# EAGLE board IDHolder_Cover (EAGLE 9.5.1)
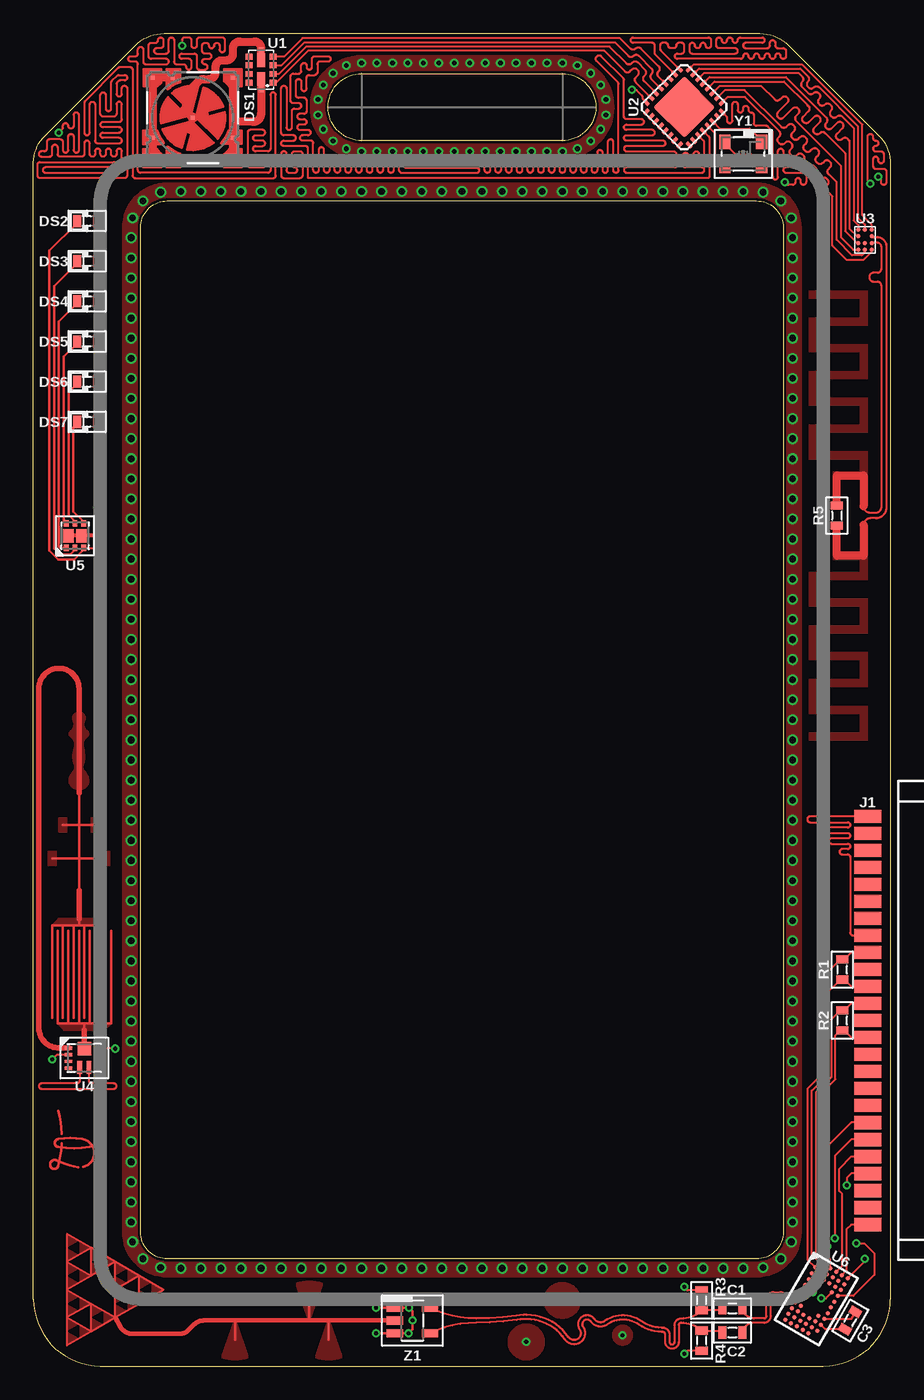
[diagram p0: board, top side]
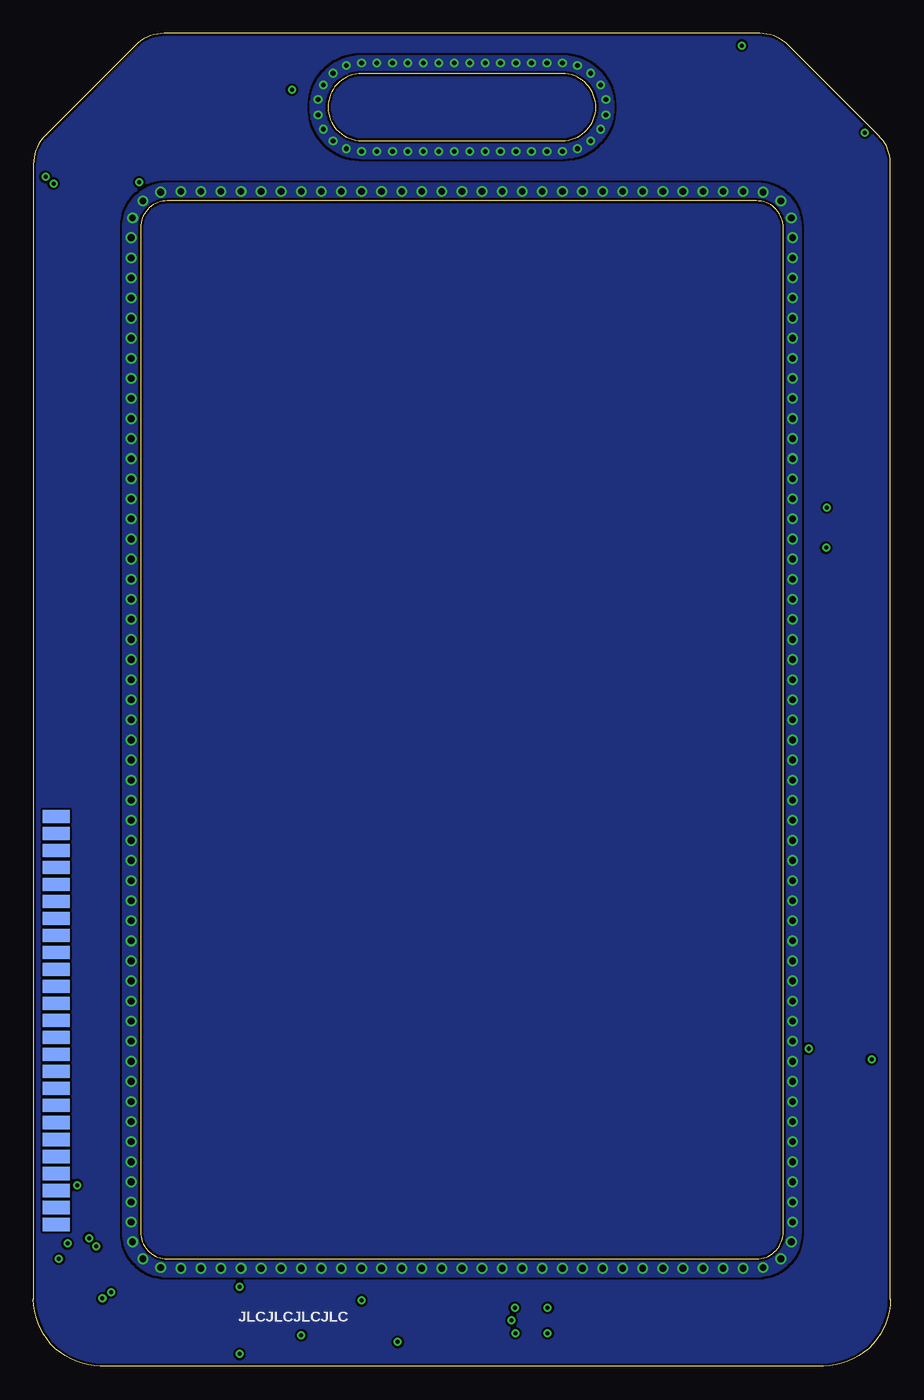
[diagram p1: board, bottom side, seen from below]

Size 64 x 99.5 mm. Coordinates in mm from the lower left corner, seen from the top.
Outline: 8,85 arc-90 10,87 54,87 arc-90 56,85 56,10 arc-90 54,8 10,8 arc-90 8,10 8,85
Outline: 0,5 0,89.86 arc-45 0.88,91.88 7.62,98.62 arc-45 9.74,99.5 54.26,99.5 arc-45 56.38,98.62 63.12,91.88 arc-45 64,89.76 64,5 arc-90 59,0 5,0 arc-90 0,5
Outline: 24.5,96.5 39.5,96.5 arc-90 42,94 arc-90 39.5,91.5 24.5,91.5 arc-90 22,94 arc-90 24.5,96.5
Copper layers (1*16): Top 0.035mm / dielectric 0.93mm / Bottom 0.035mm
Design rules "2 layer *": minimum track width 0.16mm, minimum drill 0.3mm, track to track 0.16mm, track to pad 0.16mm, pad to pad 0.16mm, via to via 0.16mm, smd to smd 0mil, copper to edge 0.2mm, drill to drill 0.3mm, minimum pad ring 0.15mm, minimum via ring 0.15mm, stop-mask expansion 0mil, vias tented up to drill 1mm, thermal gap 0.25mm

## Footprints (pad centres in the part's own frame; a part is rotated, then mirrored left to right if it is on the bottom)
1608 = smd 0.6 x 0.9: 1 -0.75,0; 2 0.75,0
LZ4-40U600 = smd 0.3 x 0.3: 1 -3,3; 2 -1.5,3; 3 3,3; 4 3,-1.5; 5 3,-3; 6 -1.5,-3; 7 -3,-3; 8 -3,-1.5; TH 0,0
1608-POL = smd 0.6 x 0.9: A 0.75,0; C -0.75,0
9M501X91 = smd 0.98 x 2.03: 1 -15.24,-3.29; 2 -13.97,-3.29; 3 -12.7,-3.29; 4 -11.43,-3.29; 5 -10.16,-3.29; 6 -8.89,-3.29; 7 -7.62,-3.29; 8 -6.35,-3.29; 9 -5.08,-3.29; 10 -3.81,-3.29; 11 -2.54,-3.29; 12 -1.27,-3.29; 13 0,-3.29; 14 1.27,-3.29; 15 2.54,-3.29; 16 3.81,-3.29; 17 5.08,-3.29; 18 6.35,-3.29; 19 7.62,-3.29; 20 8.89,-3.29; 21 10.16,-3.29; 22 11.43,-3.29; 23 12.7,-3.29; 24 13.97,-3.29; 25 15.24,-3.29 | smd 0.98 x 2.03 bottom: 26 -15.24,-3.29; 27 -13.97,-3.29; 28 -12.7,-3.29; 29 -11.43,-3.29; 30 -10.16,-3.29; 31 -8.89,-3.29; 32 -7.62,-3.29; 33 -6.35,-3.29; 34 -5.08,-3.29; 35 -3.81,-3.29; 36 -2.54,-3.29; 37 -1.27,-3.29; 38 0,-3.29; 39 1.27,-3.29; 40 2.54,-3.29; 41 3.81,-3.29; 42 5.08,-3.29; 43 6.35,-3.29; 44 7.62,-3.29; 45 8.89,-3.29; 46 10.16,-3.29; 47 11.43,-3.29; 48 12.7,-3.29; 49 13.97,-3.29; 50 15.24,-3.29
MLP832 = smd 0.44 x 0.55: 1 -0.975,-0.9; 2 -0.325,-0.9; 3 0.325,-0.9; 4 0.975,-0.9; 5 0.975,0.9; 6 0.325,0.9; 7 -0.325,0.9; 8 -0.975,0.9 | smd 1.02 x 0.63: F1 -0.7,0; F2 0.7,0 | smd 0.61 x 0.4: F1@1 -1.375,0; F2@2 1.375,0
LFCSP32 = smd 0.55 x 0.3: 1 -2.25,1.75; 2 -2.25,1.25; 3 -2.25,0.75; 4 -2.25,0.25; 5 -2.25,-0.25; 6 -2.25,-0.75; 7 -2.25,-1.25; 8 -2.25,-1.75; 17 2.25,-1.75; 18 2.25,-1.25; 19 2.25,-0.75; 20 2.25,-0.25; 21 2.25,0.25; 22 2.25,0.75; 23 2.25,1.25; 24 2.25,1.75 | smd 0.3 x 0.55: 9 -1.75,-2.25; 10 -1.25,-2.25; 11 -0.75,-2.25; 12 -0.25,-2.25; 13 0.25,-2.25; 14 0.75,-2.25; 15 1.25,-2.25; 16 1.75,-2.25; 25 1.75,2.25; 26 1.25,2.25; 27 0.75,2.25; 28 0.25,2.25; 29 -0.25,2.25; 30 -0.75,2.25; 31 -1.25,2.25; 32 -1.75,2.25 | smd 3.25 x 3.25: EXP 0,0
BGA_CB11 = smd 0.33 x 0.33: A1 -0.5,0.75; A2 0,0.75; A3 0.5,0.75; B1 -0.5,0.25; B2 0,0.25; B3 0.5,0.25; C1 -0.5,-0.25; C3 0.5,-0.25; D1 -0.5,-0.75; D2 0,-0.75; D3 0.5,-0.75
QFN-TPS61089 = smd 0.55 x 0.25: 1 -1.175,0.75; 2 -1.175,0.25; 3 -1.175,-0.25; 4 -1.175,-0.75; 7 1.175,-0.75; 8 1.175,-0.25; 9 1.175,0.25; 10 1.175,0.75 | smd 0.35 x 1: 5 -0.35,-0.7; 6 0.35,-0.7 | smd 1 x 1: 11 0,0.7
UDFN-6 = smd 0.47 x 0.35: 1 -0.915,0.65; 2 -0.915,0; 3 -0.915,-0.65; 4 0.915,-0.65; 5 0.915,0; 6 0.915,0.65 | smd 1 x 0.77: PAD-BTM 0,-0.485; PAD-TOP 0,0.485
WFBGA48 = smd 0.32 x 0.32: A1 -1.25,2.5; A2 -0.75,2.5; A3 -0.25,2.5; A4 0.25,2.5; A5 0.75,2.5; A6 1.25,2.5; B1 -1.25,2; B2 -0.75,2; B3 -0.25,2; B4 0.25,2; B5 0.75,2; B6 1.25,2; C1 -1.25,1.5; C2 -0.75,1.5; C3 -0.25,1.5; C4 0.25,1.5; C5 0.75,1.5; C6 1.25,1.5; D1 -1.25,1; D2 -0.75,1; D5 0.75,1; D6 1.25,1; E1 -1.25,0.5; E6 1.25,0.5; F1 -1.25,0; F6 1.25,0; G1 -1.25,-0.5; G6 1.25,-0.5; H1 -1.25,-1; H2 -0.75,-1; H5 0.75,-1; H6 1.25,-1; J1 -1.25,-1.5; J2 -0.75,-1.5; J3 -0.25,-1.5; J4 0.25,-1.5; J5 0.75,-1.5; J6 1.25,-1.5; K1 -1.25,-2; K2 -0.75,-2; K3 -0.25,-2; K4 0.25,-2; K5 0.75,-2; K6 1.25,-2; L1 -1.25,-2.5; L2 -0.75,-2.5; L3 -0.25,-2.5; L4 0.25,-2.5; L5 0.75,-2.5
SMD-3225 = smd 0.85 x 1.1: 1 -1.365,-0.9; 2 1.365,-0.9; 3 1.365,0.9; 4 -1.365,0.9
SOT23-5 = smd 1.22 x 0.62: 1 -1.31,0.95; 2 -1.31,0; 3 -1.31,-0.95; 4 1.31,-0.95; 5 1.31,0.95

## Placement (x,y rotation side)
C1  [1608]  52.2,4.3 0 top
C2  [1608]  52.2,2.5 180 top
C3  [1608]  61,3.4 240 top
DS1  [LZ4-40U600]  11.9,93.2 0 top
DS2  [1608-POL]  4,85.5 0 top
DS3  [1608-POL]  4,82.5 0 top
DS4  [1608-POL]  4,79.5 0 top
DS5  [1608-POL]  4,76.5 0 top
DS6  [1608-POL]  4,73.5 0 top
DS7  [1608-POL]  4,70.5 0 top
E$1  [SIGN-BRADLEY]  3.35,16.85 0 top
J1  [9M501X91]  65.6,25.8 270 top
R1  [1608]  60.4,29.6 270 top
R2  [1608]  60.4,25.8 270 top
R3  [1608]  49.9,4.9 90 top
R4  [1608]  49.9,1.9 90 top
R5  [1608]  60,63.5 90 top
U1  [MLP832]  17,96.8 90 top
U2  [LFCSP32]  48.6,94 45 top
U3  [BGA_CB11]  62.1,84.1 180 top
U4  [QFN-TPS61089]  3.8,23 0 top
U5  [UDFN-6]  3.1,62 90 top
U6  [WFBGA48]  58.47,5 330 top
Y1  [SMD-3225]  53,90.5 180 top
Z1  [SOT23-5]  28.3,3.4 0 top

## Library data of the parts
C1-C3 R1-R5 = CougsInSpace-Capacitors
DS1 = led
DS2-DS7 = CougsInSpace-LEDs
E$1 = CougsInSpace-Aesthetics
J1 = con-3m
U1 = zetex
U2 U3 = analog-devices
U4 = CougsInSpace-IC-Power
U5 Z1 = CougsInSpace-DiscreteSemi
U6 = memory
Y1 = CougsInSpace-Clocks

## Nets
A_N: C2.2 R4.2 Z1.4
A_P: C1.1 R3.1 Z1.5
ANT_N: R5.1 U3.C1
ANT_P: R5.2 U3.B1
B_N: C2.1 U6.H1
B_P: C1.2 U6.G1
C_0: U1.1 U2.31
C_1: U1.2 U2.30
C_2: U1.3 U2.29
C_3: U1.4 U2.28
D_0: U2.24 U3.D1
D_1: U2.23 U3.D2
D_2: U2.22 U3.D3
D_3: U2.21 U3.C3
D_4: U2.20 U3.B3
D_5: U2.19 U3.A3
D_6: U2.18 U3.A2
D_7: U2.17 U3.A1
OUT: Z1.2
OUT_NEG: Z1.1 Z1.3
S$1: J1.14 R2.2 U6.A3
S$2: R4.1
S$3: U2.25 U2.26
S$4: DS1.1 DS1.2 DS1.3 DS1.4 DS1.5 DS1.6 DS1.7 DS1.8 U1.F1 U1.F1@1
S$5: U2.16
S$6: U2.32
S$7: J1.24
S$8: J1.23
S$9: U6.D6
S$11: J1.9 R1.1 U6.B1
S$12: U6.C1
S$13: J1.25 U6.A5
S$14: J1.21 U6.A4
S$15: J1.20
S$16: J1.19
S$17: J1.12 R2.1 U6.A2
S$18: J1.11 R1.2 U6.A1
S$19: U6.D1
S$20: DS2.A DS3.A DS4.A DS5.A DS6.A DS7.A U5.PAD-BTM U5.PAD-TOP
S$21: DS7.C U5.4
S$22: DS6.C U5.5
S$23: DS5.C U5.6
S$24: DS4.C U5.1
S$25: DS3.C U5.2
S$26: DS2.C U5.3
S$28: U2.1
S$29: U2.8
S$30: U2.9
S$31: U2.14 Y1.1
S$32: U2.13 Y1.3
S$33: J1.22
S$34: Y1.2 Y1.4
S$35: U6.A6
S$36: U6.D2
S$37: U6.D5
S$38: R3.2
S$39: U4.5 U4.6
S$40: J1.1 J1.8
S$41: C3.2 U6.J6
S$42: C3.1 U6.H6
S$44: DS1.TH U1.F2 U1.F2@2
S$47: U4.11
S$51: U4.10
S$52: U4.2
S$53: U4.1
S$61: U2.11 U2.12

## Tracks (layer width: path | path; a pad name or v marks a point on that pad's centre or on a via)
1  (via drill 0.3)
  other vias: 36.8,1.8
  pour Top: 38.1,1.8 arc90 36.8,3.1 arc90 35.5,1.8 arc90 36.8,0.5 arc90
2  (via drill 0.3)
  other vias: 44,2.3
  pour Top: 44,3 arc-90 44.7,2.3 arc-90 44,1.6 arc-90 43.3,2.3 arc-90
3  (via drill 0.3)
  other vias: 39.5,4.9
  pour Top: 40.8,4.9 arc90 39.5,6.2 arc90 38.2,4.9 arc90 39.5,3.6 arc90
A_N
  Top 0.16: Z1.4 arc-26 33.05,3.23 arc9 36.1,3.45 arc-9 36.85,3.5 arc-55 39.7,1.98 arc180 41.05,2.91 arc-180 41.64,3.32 arc90 42.85,3.1 arc-70 45.21,3.09 arc35 46.9,2.55 46.99,2.55 arc-90 47.18,2.36 47.18,1.8 arc180 48.2,1.8 48.2,3.05 arc-90 48.39,3.24 arc-43 R4.2 51.3,2.65 C2.2
A_P
  Top 0.16: Z1.5 arc26 33.05,3.55 arc9 36.05,3.77 arc-9 36.86,3.82 arc-55 39.96,2.16 arc180 40.79,2.73 arc-180 41.9,3.5 arc90 42.67,3.36 arc-70 45.4,3.35 arc35 46.9,2.87 46.99,2.87 arc-90 47.5,2.36 47.5,1.8 arc180 47.88,1.8 47.88,3.05 arc-90 48.39,3.56 arc43 R3.1 51.3,4.15 C1.1
ANT_N
  Top 0.16: U3.C1 62.65,84.3 63,84.3 arc-90 63.7,83.6 63.7,64.1 arc-90 62.9,63.3 62.5,63.3 arc90 62,62.8
  Top 0.6: 62,62.8 62,60.5 60,60.5 R5.1
  pour Top: 57.9,47.3 57.9,46.7 62.3,46.7 62.3,49.3 58.5,49.3 58.5,50.7 62.3,50.7 62.3,53.3 58.5,53.3 58.5,54.7 62.3,54.7 62.3,57.3 58.5,57.3 58.5,58.7 62.3,58.7 62.3,62.8 61.7,62.8 61.7,60.8 60.3,60.8 59.7,60.8 59.7,60.2 61.7,60.2 61.7,59.3 57.9,59.3 57.9,56.7 61.7,56.7 61.7,55.3 57.9,55.3 57.9,52.7 61.7,52.7 61.7,51.3 57.9,51.3 57.9,48.7 61.7,48.7 61.7,47.3
ANT_P
  Top 0.16: U3.B1 62.65,83.9 63,83.9 arc-90 63.3,83.6 63.3,81.91 arc-90 63.02,81.63 62.71,81.63 arc90 62.43,81.35 62.43,81.26 arc90 62.71,80.98 63.02,80.98 arc-90 63.3,80.7 63.3,64.1 arc-90 62.9,63.7 62.5,63.7 arc-90 62,64.2
  Top 0.6: 62,64.2 62,66.5 60,66.5 R5.2
  pour Top: 57.9,79.7 57.9,80.3 62.3,80.3 62.3,77.7 58.5,77.7 58.5,76.3 62.3,76.3 62.3,73.7 58.5,73.7 58.5,72.3 62.3,72.3 62.3,69.7 58.5,69.7 58.5,68.3 62.3,68.3 62.3,64.2 61.7,64.2 61.7,66.2 60.3,66.2 59.7,66.2 59.7,66.8 61.7,66.8 61.7,67.7 57.9,67.7 57.9,70.3 61.7,70.3 61.7,71.7 57.9,71.7 57.9,74.3 61.7,74.3 61.7,75.7 57.9,75.7 57.9,78.3 61.7,78.3 61.7,79.7
B_N
  Top 0.16: U6.H1 56.77,4.87 arc45 56.64,4.93 56.33,4.93 arc-45 55.97,5.08 55.91,5.14 arc45 55.77,5.2 55.26,5.2 arc90 55.07,5.01 55.07,3.75 arc-90 54.56,3.24 53.82,3.24 arc81 C2.1 | U6.H1
B_P
  Top 0.16: U6.G1 57.08,5.25 56.33,5.25 arc-45 56.2,5.31 56.13,5.37 arc45 55.77,5.52 55.26,5.52 arc90 54.75,5.01 54.75,3.75 arc-90 54.56,3.56 53.82,3.56 arc-81 C1.2 | U6.G1
BOTTOM
  pour Bottom (rank 2): 63.12,91.88 56.38,98.62 arc45 54.26,99.5 9.74,99.5 arc45 7.62,98.62 0.88,91.88 arc45 0,89.76 0,5 arc90 5,0 59,0 arc90 64,5 64,89.76 arc45
C_0
  Top 0.16: U2.31 44.99,95.84 arc-90 44.99,96.24 45.13,96.37 arc90 45.13,96.77 45.09,96.8 arc90 44.7,96.8 44.56,96.67 arc-90 44.17,96.67 42.63,98.2 20.5,98.2 18.12,95.83 U1.1
C_1
  Top 0.16: U2.30 45.61,95.92 arc-90 45.61,96.32 45.68,96.39 arc90 45.68,96.78 45.13,97.34 arc90 44.73,97.34 44.67,97.27 arc-90 44.27,97.27 43.02,98.52 20.37,98.52 18.32,96.47 U1.2
C_2
  Top 0.16: U2.29 46.16,96.08 arc-90 46.16,96.48 arc90 46.16,96.87 45.22,97.82 arc90 44.82,97.82 arc-90 44.42,97.82 43.41,98.84 20.23,98.84 18.52,97.12 U1.3
C_3
  Top 0.16: U2.28 46.68,96.27 arc-90 46.68,96.67 arc90 46.68,97.06 45.37,98.38 arc90 44.97,98.38 arc-90 44.58,98.38 43.79,99.16 20.09,99.16 18.71,97.78 U1.4
D_0
  Top 0.16: U2.24 49.33,97.2 57.4,97.2 61.9,92.7 61.9,85.92 62.6,85.22 U3.D1
D_1
  Top 0.16: U2.23 49.71,96.88 57.27,96.88 57.84,96.3 arc-90 57.84,95.91 arc90 57.84,95.51 57.88,95.47 arc90 58.28,95.47 arc-90 58.67,95.47 61.58,92.56 61.58,85.75 62.1,85.22 U3.D2
D_2
  Top 0.16: U2.22 50.09,96.56 57.14,96.56 57.41,96.28 arc-90 57.41,95.89 arc90 57.41,95.49 57.85,95.05 arc90 58.25,95.05 arc-90 58.64,95.05 58.67,95.02 arc-90 58.67,94.62 arc90 58.67,94.23 58.7,94.19 arc90 59.1,94.19 arc-90 59.5,94.19 59.56,94.13 arc-90 59.56,93.74 arc90 59.56,93.34 59.6,93.3 arc90 60,93.3 arc-90 60.39,93.3 61.26,92.43 61.26,85.54 61.6,85.2 U3.D3
D_3
  Top 0.16: U2.21 50.48,96.23 56.2,96.23 59.22,93.22 arc-90 59.22,92.82 arc90 59.22,92.43 59.22,92.42 arc90 59.62,92.42 60.01,92.82 arc-90 60.41,92.82 60.41,92.82 arc-90 60.41,92.42 60.02,92.02 arc90 60.02,91.63 60.02,91.63 arc90 60.41,91.63 arc-90 60.81,91.63 60.94,91.5 60.94,84.94 61.52,84.35 U3.C3
D_4
  Top 0.16: U2.20 50.87,95.91 56.06,95.91 57.8,94.18 | U3.B3 61.52,83.85 60.62,84.75 60.62,90.56 59.13,92.05 arc90 58.73,92.05 arc-90 58.34,92.05 58.32,92.07 arc-90 58.32,92.47 58.71,92.86 arc90 58.71,93.26 58.7,93.28 arc90 58.3,93.28 57.9,92.88 arc-90 57.51,92.88 57.49,92.9 arc-90 57.49,93.29 57.89,93.69 arc90 57.89,94.09 57.8,94.18 | 57.8,94.18
D_5
  Top 0.16: U2.19 51.26,95.59 54.33,95.59 55.35,94.58 arc90 55.74,94.58 55.89,94.72 arc-90 56.28,94.72 56.3,94.71 arc-90 56.3,94.31 55.61,93.63 arc90 55.61,93.23 55.62,93.22 arc90 56.02,93.22 56.7,93.91 arc-90 57.1,93.91 57.11,93.9 arc-90 57.11,93.5 56.96,93.36 arc90 56.96,92.96 60.3,89.62 60.3,84.28 61.23,83.35 U3.A3
D_6
  Top 0.16: U2.18 51.64,95.28 53.09,95.28 55.84,92.53 arc90 56.23,92.53 56.35,92.65 arc-90 56.75,92.65 56.8,92.6 arc-90 56.8,92.2 56.68,92.08 arc90 56.68,91.69 56.74,91.63 arc90 57.13,91.63 57.25,91.75 arc-90 57.65,91.75 57.7,91.7 arc-90 57.7,91.3 57.58,91.18 arc90 57.58,90.79 57.64,90.73 arc90 58.03,90.73 58.15,90.85 arc-90 58.55,90.85 58.6,90.8 arc-90 58.6,90.4 58.48,90.28 arc90 58.48,89.89 58.54,89.83 arc90 58.93,89.83 59.05,89.95 arc-90 59.45,89.95 59.5,89.9 arc-90 59.5,89.5 59.38,89.38 arc90 59.38,88.99 59.98,88.39 59.98,84.09 61.13,82.94 61.84,82.94 62.1,83.2 U3.A2
D_7
  Top 0.16: U2.17 51.83,94.75 53.14,94.75 55.7,92.2 arc-90 55.7,91.8 55.65,91.75 arc90 55.65,91.35 55.7,91.3 arc90 56.1,91.3 56.15,91.35 arc-90 56.55,91.35 56.6,91.3 arc-90 56.6,90.9 56.55,90.85 arc90 56.55,90.45 56.6,90.4 arc90 57,90.4 57.05,90.45 arc-90 57.45,90.45 57.5,90.4 arc-90 57.5,90 57.45,89.95 arc90 57.45,89.55 57.5,89.5 arc90 57.9,89.5 57.95,89.55 arc-90 58.35,89.55 58.4,89.5 arc-90 58.4,89.1 58.35,89.05 arc90 58.35,88.65 58.4,88.6 arc90 58.8,88.6 58.85,88.65 arc-90 59.25,88.65 59.3,88.6 arc-90 59.3,88.2 59.25,88.15 arc90 59.25,87.75 59.66,87.34 59.66,83.66 60.7,82.62 62.02,82.62 62.6,83.2 U3.A1
ID  (via drill 0.5)
  other vias: 32,87.7 30.5,87.7 29,87.7 27.5,87.7 26,87.7 24.5,87.7 23,87.7 21.5,87.7 20,87.7 18.5,87.7 17,87.7 15.5,87.7 14,87.7 12.5,87.7 11,87.7 7.3,48.25 7.3,49.75 7.3,51.25 7.3,52.75 7.3,54.25 7.3,55.75 7.3,57.25 7.3,58.75 7.3,60.25 7.3,61.75 7.3,63.25 7.3,64.75 7.3,66.25 7.3,67.75 7.3,69.25 7.3,70.75 7.3,72.25 7.3,73.75 7.3,75.25 7.3,76.75 7.3,78.25 7.3,79.75 7.3,81.25 7.3,82.75 7.3,84.25 9.5,87.65 8.18,86.99 7.4,85.73 30.5,7.3 29,7.3 27.5,7.3 26,7.3 24.5,7.3 23,7.3 21.5,7.3 20,7.3 18.5,7.3 17,7.3 15.5,7.3 14,7.3 12.5,7.3 11,7.3 7.3,46.75 7.3,45.25 7.3,43.75 7.3,42.25 7.3,40.75 7.3,39.25 7.3,37.75 7.3,36.25 7.3,34.75 7.3,33.25 7.3,31.75 7.3,30.25 7.3,28.75 7.3,27.25 7.3,25.75 7.3,24.25 7.3,22.75 7.3,21.25 7.3,19.75 7.3,18.25 7.3,16.75 7.3,15.25 7.3,13.75 7.3,12.25 7.3,10.75 9.5,7.35 8.18,8.01 7.4,9.27 32,7.3 33.5,7.3 35,7.3 36.5,7.3 38,7.3 39.5,7.3 41,7.3 42.5,7.3 44,7.3 45.5,7.3 47,7.3 48.5,7.3 50,7.3 51.5,7.3 53,7.3 56.7,46.75 56.7,45.25 56.7,43.75 56.7,42.25 56.7,40.75 56.7,39.25 56.7,37.75 56.7,36.25 56.7,34.75 56.7,33.25 56.7,31.75 56.7,30.25 56.7,28.75 56.7,27.25 56.7,25.75 56.7,24.25 56.7,22.75 56.7,21.25 56.7,19.75 56.7,18.25 56.7,16.75 56.7,15.25 56.7,13.75 56.7,12.25 56.7,10.75 54.5,7.35 55.82,8.01 56.6,9.27 33.5,87.7 35,87.7 36.5,87.7 38,87.7 39.5,87.7 41,87.7 42.5,87.7 44,87.7 45.5,87.7 47,87.7 48.5,87.7 50,87.7 51.5,87.7 53,87.7 56.7,48.25 56.7,49.75 56.7,51.25 56.7,52.75 56.7,54.25 56.7,55.75 56.7,57.25 56.7,58.75 56.7,60.25 56.7,61.75 56.7,63.25 56.7,64.75 56.7,66.25 56.7,67.75 56.7,69.25 56.7,70.75 56.7,72.25 56.7,73.75 56.7,75.25 56.7,76.75 56.7,78.25 56.7,79.75 56.7,81.25 56.7,82.75 56.7,84.25 54.5,87.65 55.82,86.99 56.6,85.73
  pour Top: 57.3,10 57.3,85 arc90 54,88.3 10,88.3 arc90 6.7,85 6.7,10 arc90 10,6.7 54,6.7 arc90
  pour Bottom: 57.3,10 57.3,85 arc90 54,88.3 10,88.3 arc90 6.7,85 6.7,10 arc90 10,6.7 54,6.7 arc90
LOOP  (via drill 0.35)
  other vias: 23.37,97.1 24.5,97.3 25.65,97.3 26.81,97.3 27.96,97.3 29.12,97.3 30.27,97.3 31.42,97.3 32.58,97.3 33.73,97.3 34.88,97.3 36.04,97.3 37.19,97.3 38.35,97.3 39.5,97.3 40.63,97.1 41.62,96.53 42.36,95.65 42.75,94.57 42.75,93.43 42.36,92.35 41.62,91.47 40.63,90.9 39.5,90.7 38.35,90.7 37.19,90.7 36.04,90.7 34.88,90.7 33.73,90.7 32.58,90.7 31.42,90.7 30.27,90.7 29.12,90.7 27.96,90.7 26.81,90.7 25.65,90.7 24.5,90.7 23.37,90.9 22.38,91.47 21.64,92.35 21.25,93.43 21.25,94.57 21.64,95.65 22.38,96.53
  pour Top: 20.7,94 arc-90 24.5,97.8 39.5,97.8 arc-90 43.3,94 arc-90 39.5,90.2 24.5,90.2 arc-90
  pour Bottom: 20.7,94 arc-90 24.5,97.8 39.5,97.8 arc-90 43.3,94 arc-90 39.5,90.2 24.5,90.2 arc-90
OUT
  Top 0.16: 7.9,6.74 9.7,5.7 7.9,4.66 | 7.9,6.74 6.1,7.78 | 6.1,7.78 4.3,8.82 | 4.3,8.82 2.5,9.86 2.5,7.78 | 2.5,7.78 2.5,5.7 | 2.5,5.7 2.5,3.62 | 2.5,3.62 2.5,1.54 4.3,2.58 | 4.3,2.58 6.1,3.62 | 6.1,3.62 7.9,4.66 | 2.5,5.7 4.3,4.66 | 4.3,4.66 6.1,3.62 | 6.1,3.62 6.1,5.7 | 6.1,5.7 6.1,7.78 | 6.1,7.78 4.3,6.74 | 4.3,6.74 2.5,5.7 | 6.1,5.7 7.9,4.66 | 7.9,4.66 7.9,6.74 | 7.9,6.74 6.1,5.7 | 4.3,8.82 2.5,7.78 | 2.5,7.78 4.3,6.74 | 4.3,6.74 4.3,8.82 | 2.5,3.62 4.3,2.58 | 4.3,2.58 4.3,4.66 | 4.3,4.66 2.5,3.62
  Top 0.2: 22.05,3.4 22.05,1.95 | 15.05,1.95 15.05,3.4 | 20.6,4.85 20.6,3.4
  Top 0.32: Z1.2 22.05,3.4 20.6,3.4 15.05,3.4 12.71,3.4 arc45 12.01,3.11 11.59,2.69 arc-45 10.89,2.4 7.38,2.4 arc-60 6.52,2.9 6.1,3.62
  pour Top: 22.05,3.4 22.99,0.65 arc-38 21.11,0.65
  pour Top: 15.05,3.4 15.99,0.65 arc-38 14.11,0.65
  pour Top: 20.6,3.4 19.66,6.15 arc-38 21.54,6.15
  pour Top: 9.7,5.7 2.5,9.86 2.5,1.54
  cutout Top: 3.4,6.22 3.4,7.26 2.5,6.74
  cutout Top: 6.1,6.74 7,6.22 7,7.26
  cutout Top: 5.2,4.14 4.3,3.62 5.2,3.1
OUT_NEG  (via drill 0.3)
  Top 0.2: v25.6,4.35 Z1.1 v28.05,4.35 28.3,4.1 v28.3,3.4 28.3,2.75 v28,2.45 Z1.3 v25.6,2.45
S$1
  Top 0.16: J1.14 61.07,24.53 60.55,25.05 R2.2 60.25,25.05 59.9,24.7 59.9,21.42 58.76,20.28 58.76,8.7 59.51,7.95 U6.A3
S$2  (via drill 0.3)
  Top 0.16: R4.1 48.85,1.15 v48.6,0.9
S$3
  Top 0.16: U2.26 46.46,97.91 arc-45 46.4,98.05 46.4,98.6 arc90 46.2,98.8 44.8,98.8 arc-90 44.6,99 arc-90 44.8,99.2 50.4,99.2 arc-90 50.6,99 50.6,98.6 arc-90 50.4,98.4 arc-90 50.2,98.6 arc90 50,98.8 arc90 49.8,98.6 arc-90 49.6,98.4 arc-90 49.4,98.6 arc90 49.2,98.8 arc90 49,98.6 49,98.2 arc90 49.2,98 52.4,98 arc90 52.6,98.2 arc90 52.4,98.4 51.2,98.4 arc-90 51,98.6 51,99 arc-90 51.2,99.2 arc-90 51.4,99 arc90 51.6,98.8 arc90 51.8,99 arc-90 52,99.2 arc-90 52.2,99 arc90 52.4,98.8 arc90 52.6,99 arc-90 52.8,99.2 54.4,99.2 arc-90 54.6,99 arc-90 54.4,98.8 53.2,98.8 arc90 53,98.6 arc90 53.2,98.4 54.8,98.4 arc90 55,98.6 55,98.8 arc-90 55.2,99 arc-90 55.4,98.8 55.4,98.6 arc90 55.6,98.4 56,98.4 arc-90 56.2,98.2 56.2,97.8 arc-90 56,97.6 arc-90 55.8,97.8 arc90 55.6,98 arc90 55.4,97.8 arc-90 55.2,97.6 arc-90 55,97.8 arc90 54.8,98 arc90 54.6,97.8 arc-90 54.4,97.6 arc-90 54.2,97.8 arc90 54,98 arc90 53.8,97.8 arc-90 53.6,97.6 arc-90 53.4,97.8 arc90 53.2,98 arc90 53,97.8 arc-90 52.8,97.6 48.1,97.6 arc-90 47.9,97.8 arc-90 48.1,98 48.4,98 arc90 48.6,98.2 48.6,98.6 arc90 48.4,98.8 48.2,98.8 arc90 48,98.6 arc-90 47.8,98.4 47.6,98.4 arc-90 47.4,98.6 arc90 47.2,98.8 47,98.8 arc90 46.8,98.6 46.8,98.36 arc45 46.86,98.22 U2.25
S$4
  Top 0.2: 17,95.9 U1.F1
  Top 0.6: DS1.2 DS1.1 DS1.8 DS1.7 DS1.6 DS1.5 DS1.4 14.9,92.9 | 14.9,92.9 14.9,93.1 DS1.3 | U1.F1 U1.F1@1 17,93.5 arc-90 16.4,92.9 14.9,92.9
S$5  (via drill 0.3)
  Top 0.16: v56.1,88.4 56.24,88.26 arc45 56.38,88.2 56.7,88.2 arc90 56.9,88.4 56.9,88.5 arc-90 57.1,88.7 arc-90 57.3,88.5 57.3,88.4 arc90 57.5,88.2 arc90 57.7,88.4 57.7,88.9 arc90 57.5,89.1 56.2,89.1 arc-90 56,89.3 arc-90 56.2,89.5 56.8,89.5 arc90 57,89.7 arc90 56.8,89.9 56.2,89.9 arc-90 56,90.1 56,90.7 arc90 55.8,90.9 arc90 55.6,90.7 55.6,88.8 arc-90 55.4,88.6 arc-90 55.2,88.8 55.2,92.12 arc45 55.14,92.26 54.86,92.54 arc45 54.72,92.6 54,92.6 arc-90 53.8,92.8 53.8,93.4 arc90 53.6,93.6 arc-90 53.4,93.8 53.4,93.9 arc90 53.2,94.1 arc90 53,93.9 53,93.8 arc-90 52.8,93.6 arc-90 52.6,93.8 52.6,94.2 arc90 52.4,94.4 arc90 52.2,94.2 52.2,93 arc-90 52,92.8 arc-90 51.8,93 51.8,93.19 arc45 51.74,93.33 U2.16
S$6  (via drill 0.3)
  Top 0.16: v44.7,95.3 44.92,95.3 arc-45 45.06,95.24 45.44,94.86 arc-45 45.5,94.72 45.5,94.71 arc45 45.56,94.57 U2.32
S$9  (via drill 0.3)
  Top 0.16: v61.45,9.15 62.05,9.15 62.8,8.4 62.8,6.8 61.24,5.24 U6.D6
S$10  (via drill 0.3)
  Top 0.16: v63.1,88.8 arc-90 63.3,88.6 63.3,88.4 arc90 63.5,88.2 arc90 63.7,88.4 63.7,89.2 arc90 63.5,89.4 62.9,89.4 arc-90 62.7,89.6 62.7,90.1 arc-90 62.9,90.3 arc-90 63.1,90.1 63.1,90 arc90 63.3,89.8 arc90 63.5,90 63.5,90.5 arc90 63.3,90.7 62.9,90.7 arc-90 62.7,90.9 arc-90 62.9,91.1 arc90 63.1,91.3 arc90 62.9,91.5 arc-90 62.7,91.7 62.7,91.8 arc90 62.5,92 arc90 62.3,91.8 62.3,88.5 arc90 v62.5,88.3
S$11
  Top 0.16: J1.9 61.08,30.88 60.55,30.35 R1.1 60.25,30.35 58.94,29.04 58.94,21.84 57.8,20.7 57.8,7.95 U6.B1
S$13
  Top 0.16: U6.A5 60.72,7.14 60.72,10.22 61.06,10.56 J1.25
S$14
  Top 0.16: J1.21 61.09,15.64 60.17,14.72 60.17,13.08 60.4,12.85 60.4,7.5 U6.A4
S$15  (via drill 0.3)
  Top 0.16: J1.20 61.06,16.91 59.85,15.7 v59.85,9.55
S$16  (via drill 0.3)
  Top 0.16: J1.19 61.08,18.18 59.3,16.4 v59.3,8.93
S$17
  Top 0.16: J1.12 61.07,27.07 60.55,26.55 R2.1 60.25,26.55 59.58,25.88 59.58,21.56 58.44,20.42 58.44,8.56 59.07,7.93 U6.A2
S$18
  Top 0.16: J1.11 61.06,28.34 60.55,28.85 R1.2 60.25,28.85 59.26,27.86 59.26,21.7 58.12,20.56 58.12,8.31 U6.A1
S$20  (via drill 0.3)
  Top 0.3: DS2.A DS3.A DS4.A DS5.A DS6.A DS7.A v4.75,64.1 4.75,62.25 4.5,62 U5.PAD-BTM U5.PAD-TOP
S$21
  Top 0.2: U5.4 3.75,63.05 2.98,63.81 2.98,70.08 3.25,70.35 DS7.C
S$22
  Top 0.2: U5.5 3.1,63.05 2.62,63.52 2.62,72.72 3.25,73.35 DS6.C
S$23
  Top 0.2: U5.6 2.45,62.95 2.26,63.14 2.26,75.36 3.25,76.35 DS5.C
S$24
  Top 0.2: U5.1 2.02,61.09 1.9,61.2 1.9,78 3.25,79.35 DS4.C
S$25
  Top 0.2: U5.2 3.1,60.95 2.73,60.59 2,60.59 1.54,61.05 1.54,80.64 3.25,82.35 DS3.C
S$26  (via drill 0.3)
  Top 0.16: U5.3 4.79,61.09 v4.8,61.1
  Top 0.2: U5.3 3.75,60.95 3.02,60.23 1.85,60.23 1.18,60.9 1.18,83.28 3.25,85.35 DS2.C
S$27  (via drill 0.3)
  Top 0.16: v1.9,92.1 2.14,92.34 arc45 2.2,92.48 2.2,92.6 arc-90 2.4,92.8 arc-90 2.6,92.6 arc90 2.8,92.4 arc90 3,92.6 3,93.4 arc-90 3.2,93.6 arc-90 3.4,93.4 3.4,90.8 arc-90 3.2,90.6 arc-90 3,90.8 3,91.8 arc90 2.8,92 arc90 2.6,91.8 2.6,90.8 arc-90 2.4,90.6 arc-90 2.2,90.8 2.2,91.4 arc90 2,91.6 1.2,91.6 arc90 1,91.4 1,90.9 arc-90 0.8,90.7 0.6,90.7 arc90 0.4,90.5 arc90 0.6,90.3 1.2,90.3 arc90 1.4,90.5 1.4,91 arc-90 1.6,91.2 arc-90 1.8,91 1.8,90.5 arc90 2,90.3 3.6,90.3 arc90 3.8,90.5 3.8,91.3 arc-90 4,91.5 arc-90 4.2,91.3 4.2,90.5 arc90 4.4,90.3 arc90 4.6,90.5 4.6,90.7 arc-90 4.8,90.9 arc-90 5,90.7 5,90.5 arc90 5.2,90.3 arc90 5.4,90.5 5.4,90.7 arc-90 5.6,90.9 arc-90 5.8,90.7 5.8,90.5 arc90 6,90.3 arc90 6.2,90.5 6.2,90.7 arc-90 6.4,90.9 arc-90 6.6,90.7 6.6,89.3 arc-90 6.4,89.1 0.9,89.1 arc-90 0.7,89.3 arc-90 0.9,89.5 6,89.5 arc90 6.2,89.7 arc90 6,89.9 0.5,89.9 arc90 0.3,89.7 0.3,88.9 arc90 0.5,88.7 6.8,88.7 arc90 7,88.9 7,95.4 arc90 6.8,95.6 arc90 6.6,95.4 6.6,95 arc-90 6.4,94.8 arc-90 6.2,95 6.2,95.72 arc-45 6.26,95.86 6.34,95.94 arc-45 6.48,96 6.8,96 arc90 7,96.2 arc90 6.8,96.4 6.38,96.4 arc45 6.24,96.34 5.86,95.96 arc45 5.8,95.82 5.8,93.9 arc-90 5.6,93.7 arc-90 5.4,93.9 5.4,94.9 arc90 5.2,95.1 arc90 5,94.9 5,93.5 arc90 5.2,93.3 6,93.3 arc90 6.2,93.5 6.2,94.2 arc-90 6.4,94.4 arc-90 6.6,94.2 6.6,93.1 arc-90 6.4,92.9 5.2,92.9 arc90 5,92.7 arc90 5.2,92.5 6.4,92.5 arc-90 6.6,92.3 arc-90 6.4,92.1 5.2,92.1 arc90 5,91.9 arc90 5.2,91.7 6.4,91.7 arc-90 6.6,91.5 arc-90 6.4,91.3 4.8,91.3 arc-90 4.6,91.5 4.6,94.2 arc90 4.4,94.4 arc90 4.2,94.2 4.2,92.1 arc-90 4,91.9 arc-90 3.8,92.1 3.8,94.32 arc-45 3.86,94.46 6.34,96.94 arc-45 6.48,97 7.2,97 arc-90 7.4,96.8 7.4,88.9 arc90 7.6,88.7 17.9,88.7 arc90 18.1,88.9 18.1,94.9 arc90 17.9,95.1 arc90 17.7,94.9 17.7,90.9 arc-90 17.5,90.7 16.6,90.7 arc-90 16.4,90.9 arc-90 16.6,91.1 17.1,91.1 arc90 17.3,91.3 arc90 17.1,91.5 16.6,91.5 arc-90 16.4,91.7 arc-90 16.6,91.9 17.1,91.9 arc90 17.3,92.1 arc90 17.1,92.3 16.2,92.3 arc90 16,92.1 16,89.7 arc90 16.2,89.5 17.1,89.5 arc90 17.3,89.7 arc90 17.1,89.9 16.6,89.9 arc-90 16.4,90.1 arc-90 16.6,90.3 17.5,90.3 arc-90 17.7,90.1 17.7,89.3 arc-90 17.5,89.1 8,89.1 arc-90 7.8,89.3 7.8,97.2 arc90 7.6,97.4 7.28,97.4 arc-135 7.14,97.74 arc-45 7.28,97.8 7.6,97.8 arc90 7.8,98 7.8,98.3 arc-90 8,98.5 arc-90 8.2,98.3 8.2,97.4 arc90 8.4,97.2 9.9,97.2 arc90 10.1,97.4 arc90 9.9,97.6 8.8,97.6 arc-90 8.6,97.8 8.6,98.6 arc-90 8.8,98.8 9.1,98.8 arc90 9.3,99 arc-90 9.5,99.2 arc-90 9.7,99 9.7,98.6 arc-90 9.5,98.4 9.2,98.4 arc90 9,98.2 arc90 9.2,98 9.9,98 arc90 10.1,98.2 10.1,99 arc-90 10.3,99.2 arc-90 10.5,99 10.5,97.4 arc90 10.7,97.2 11.2,97.2 arc-90 11.4,97 arc90 11.6,96.8 arc90 11.8,97 11.8,97.4 arc90 11.6,97.6 11.1,97.6 arc-90 10.9,97.8 arc-90 11.1,98 12,98 arc-90 12.2,97.8 12.2,97 arc90 12.4,96.8 12.8,96.8 arc90 13,97 arc90 12.8,97.2 arc-90 12.6,97.4 arc-90 12.8,97.6 13.1,97.6 arc90 13.3,97.8 arc90 13.1,98 12.8,98 arc-90 12.6,98.2 12.6,98.6 arc-90 12.8,98.8 12.9,98.8 arc-90 13.1,98.6 arc90 13.3,98.4 arc90 13.5,98.6 arc-90 13.7,98.8 arc-90 13.9,98.6 13.9,98.3 arc90 14.1,98.1 arc90 14.3,98.3 14.3,99 arc90 14.1,99.2 12.4,99.2 arc90 12.2,99 12.2,98.6 arc-90 12,98.4 arc-90 11.8,98.6 11.8,99 arc90 11.6,99.2 11.3,99.2 arc90 11.1,99 v11.1,98.6
S$31
  Top 0.16: U2.14 51.26,92.4 53.5,92.4 54.36,91.53 Y1.1
S$32
  Top 0.16: U2.13 50.9,92.05 50.9,90.5 51.64,89.77 Y1.3
S$33  (via drill 0.3)
  Top 0.16: J1.22 61.07,14.37 60.75,14.05 v60.75,13.5
S$34
  Top 0.16: Y1.4 54.36,89.73 53.6,90.5 52.4,90.5 51.64,91.27 Y1.2
S$35  (via drill 0.3)
  Top 0.16: v62.1,8 62.1,7.83 U6.A6
S$36  (via drill 0.3)
  Top 0.16: v58.2,5.5 58.32,5.62 U6.D2
S$37  (via drill 0.3)
  Top 0.16: v58.85,5.05 59.18,5.05 U6.D5
S$38  (via drill 0.3)
  Top 0.16: v48.6,5.9 48.85,5.65 R3.2
S$39
  Top 0.16: U4.5 3.45,21.3 arc-90 3.25,21.1 0.6,21.1 arc90 0.4,20.9 arc90 0.6,20.7 6,20.7 arc90 6.2,20.9 arc90 6,21.1 4.35,21.1 arc-90 4.15,21.3 U4.6
S$40
  Top 0.16: J1.1 58,41.04 arc90 57.8,40.84 57.8,40.8 arc90 58,40.6 60.8,40.6 arc-90 61,40.4 arc-90 60.8,40.2 58.8,40.2 arc90 58.6,40 arc90 58.8,39.8 60.8,39.8 arc-90 61,39.6 arc-90 60.8,39.4 59.6,39.4 arc90 59.4,39.2 arc90 59.6,39 60.8,39 arc-90 61,38.8 arc-90 60.8,38.6 60.4,38.6 arc90 60.2,38.4 arc90 60.4,38.2 60.8,38.2 arc-90 61,38 61,32.35 arc90 61.2,32.15 J1.8
S$41
  Top 0.16: 60.52,2.75 C3.2 59.13,2.75 U6.J6
S$42
  Top 0.16: C3.1 61.06,3.5 U6.H6
S$44
  Top 0.6: DS1.TH 11.4,93.7 11.4,95 12.35,95.95 arc-45 12.71,96.1 13.1,96.1 arc90 13.6,96.6 13.6,97 arc-90 14.1,97.5 14.4,97.5 arc90 14.9,98 14.9,98.4 arc-90 15.4,98.9 16.5,98.9 arc-90 17,98.4 U1.F2@2 U1.F2
S$47
  Top 0.2: 3.4,32.5 3.4,25.6 | 3.4,25.6 2.6,25.6 | 2.6,25.6 2.6,32.5 | 2.6,25.6 1.8,25.6 1.8,32.5 | 3.4,25.6 3.8,25.6 | 3.8,25.6 4.2,25.6 | 4.2,32.5 4.2,25.6 | 4.2,25.6 5,25.6 | 5,25.6 5,32.5 | 5,25.6 5.8,25.6 5.8,32.5 | 3.8,25.1 3.8,25.6
  Top 0.4: U4.11 3.8,25.1
  pour Top: 5.8,25.6 5.3,25.1 2.3,25.1 1.8,25.6
S$51  (via drill 0.3)
  Top 0.16: U4.10 6.05,23.75 v6.1,23.7
S$52  (via drill 0.3)
  Top 0.16: U4.2 1.75,23.25 v1.4,22.9
S$53
  Top 0.2: 3,32.9 3.4,32.9 | 3,32.9 3,26 | 3,32.9 2.2,32.9 | 2.2,32.9 2.2,26 | 2.2,32.9 1.4,32.9 1.4,26 | 3.8,32.9 3.4,32.9 | 3.8,32.9 3.8,26 | 3.8,32.9 4.6,32.9 | 4.6,32.9 4.6,26 | 4.6,32.9 5.4,32.9 5.4,26 | 3.4,32.9 3.4,33.4 | 3.4,35.5 3.4,37.9 | 3.4,42.8 3.4,40.4 | 3.4,37.9 3.4,40.4 | 3.4,37.9 1.4,37.9 | 3.4,37.9 5.4,37.9 | 3.4,40.4 2.2,40.4 | 3.4,40.4 4.6,40.4
  Top 0.4: 3.4,33.4 3.4,35.5 | 3.4,42.8 3.4,50.6 arc90 1.9,52.1 arc90 0.4,50.6 0.4,25.25 arc90 1.9,23.75 U4.1
  pour Top: 1.4,32.9 1.9,33.4 4.9,33.4 5.4,32.9
  pour Top: 1.1,38.4 1.1,37.4 1.7,37.4 1.7,38.4
  pour Top: 5.1,38.4 5.1,37.4 5.7,37.4 5.7,38.4
  pour Top: 1.9,40.9 1.9,39.9 2.5,39.9 2.5,40.9
  pour Top: 4.3,40.9 4.3,39.9 4.9,39.9 4.9,40.9
  pour Top: 3.4,43.1 3.5,43.1 arc99 4.1,43.8 arc36 3.8,44.4 arc-66 3.7,44.9 arc31 3.8,45.8 arc5 3.7,46.3 arc-50 3.8,46.8 arc-18 4,47 arc108 4,47.4 arc-80 3.8,48.2 arc119 3.4,48.8
  pour Top (no thermals): 3.4,43.1 3.3,43.1 arc-99 2.7,43.8 arc-36 3,44.4 arc66 3.1,44.9 arc-31 3,45.8 arc-5 3.1,46.3 arc50 3,46.8 arc18 2.8,47 arc-108 2.8,47.4 arc80 3,48.2 arc-119 3.4,48.8
S$61
  Top 0.16: U2.12 50.44,91.81 arc-45 50.5,91.66 50.5,88.9 arc-90 50.3,88.7 20.5,88.7 20.5,89.7 arc90 20.3,89.9 arc90 20.1,89.7 20.1,88.9 arc-90 19.9,88.7 18.7,88.7 arc-90 18.5,88.9 18.5,90.5 arc-90 18.7,90.7 arc-90 18.9,90.5 18.9,90.3 18.9,89.3 arc90 19.1,89.1 19.5,89.1 arc90 19.7,89.3 arc90 19.5,89.5 arc-90 19.3,89.7 arc-90 19.5,89.9 arc90 19.7,90.1 arc90 19.5,90.3 arc-90 19.3,90.5 arc-90 19.5,90.7 19.9,90.7 arc-90 20.1,90.5 arc90 20.3,90.3 arc90 20.5,90.5 20.5,90.9 arc90 20.3,91.1 18.7,91.1 arc-90 18.5,91.3 arc-90 18.7,91.5 19.4,91.5 arc90 19.6,91.7 arc90 19.4,91.9 18.7,91.9 arc-90 18.5,92.1 18.5,95.4 arc-90 18.7,95.6 arc-90 18.9,95.4 18.9,92.5 arc90 19.1,92.3 arc90 19.3,92.5 19.3,93.7 arc-90 19.5,93.9 19.8,93.9 arc90 20,94.1 arc90 19.8,94.3 19.4,94.3 arc-90 19.2,94.5 19.2,95.3 | U2.11 50.04,91.5 arc-45 50.1,91.36 50.1,90 arc-90 49.9,89.8 arc-90 49.7,90 49.7,90.5 arc90 49.5,90.7 arc90 49.3,90.5 49.3,90 arc-90 49.1,89.8 arc-90 48.9,90 48.9,90.4 arc90 48.7,90.6 arc90 48.5,90.4 48.5,89.7 arc90 48.7,89.5 49.9,89.5 arc-90 50.1,89.3 arc-90 49.9,89.1 44.3,89.1 arc-90 44.1,89.3 arc-90 44.3,89.5 47.9,89.5 arc90 48.1,89.7 arc90 47.9,89.9 44.3,89.9 arc-90 44.1,90.1 arc-90 44.3,90.3 47.8,90.3 arc90 48,90.5 arc90 47.8,90.7 44.3,90.7 arc-90 44.1,90.9 arc-90 44.3,91.1 47,91.1 arc90 47.2,91.3 arc90 47,91.5 44.3,91.5 arc-90 44.1,91.7 arc-90 44.3,91.9 46.2,91.9 arc90 46.4,92.1 arc90 46.2,92.3 44.3,92.3 arc-90 44.1,92.5 arc-90 44.3,92.7 45.4,92.7 arc90 45.6,92.9 arc90 45.4,93.1 44.3,93.1 arc-90 44.1,93.3 44.1,96.02 arc45 44.04,96.16 42.39,97.81 arc90 42.11,97.81 42.04,97.74 arc90 42.04,97.46 43.64,95.86 arc-45 43.7,95.72 43.7,89.3 arc-90 43.5,89.1 arc-90 43.3,89.3 43.3,91.4 arc90 43.1,91.6 arc90 42.9,91.4 42.9,89.3 arc-90 42.7,89.1 arc-90 42.5,89.3 42.5,90.6 arc90 42.3,90.8 arc90 42.1,90.6 42.1,89.3 arc-90 41.9,89.1 arc-90 41.7,89.3 41.7,90.1 arc90 41.5,90.3 arc90 41.3,90.1 41.3,89.3 arc-90 41.1,89.1 arc-90 40.9,89.3 40.9,89.8 arc90 40.7,90 arc90 40.5,89.8 40.5,89.3 arc-90 40.3,89.1 arc-90 40.1,89.3 40.1,89.6 arc90 39.9,89.8 arc90 39.7,89.6 39.7,89.3 arc-90 39.5,89.1 arc-90 39.3,89.3 39.3,89.6 arc90 39.1,89.8 arc90 38.9,89.6 38.9,89.3 arc-90 38.7,89.1 arc-90 38.5,89.3 38.5,89.6 arc90 38.3,89.8 arc90 38.1,89.6 38.1,89.3 arc-90 37.9,89.1 arc-90 37.7,89.3 37.7,89.6 arc90 37.5,89.8 arc90 37.3,89.6 37.3,89.3 arc-90 37.1,89.1 arc-90 36.9,89.3 36.9,89.6 arc90 36.7,89.8 arc90 36.5,89.6 36.5,89.3 arc-90 36.3,89.1 arc-90 36.1,89.3 36.1,89.6 arc90 35.9,89.8 arc90 35.7,89.6 35.7,89.3 arc-90 35.5,89.1 arc-90 35.3,89.3 35.3,89.6 arc90 35.1,89.8 arc90 34.9,89.6 34.9,89.3 arc-90 34.7,89.1 arc-90 34.5,89.3 34.5,89.6 arc90 34.3,89.8 arc90 34.1,89.6 34.1,89.3 arc-90 33.9,89.1 arc-90 33.7,89.3 33.7,89.6 arc90 33.5,89.8 27.88,89.8 arc90 27.7,89.62 arc90 27.88,89.45 33.12,89.45 arc-90 33.3,89.28 arc-90 33.12,89.1 27.5,89.1 arc-90 27.3,89.3 27.3,89.6 arc90 27.1,89.8 arc90 26.9,89.6 26.9,89.3 arc-90 26.7,89.1 arc-90 26.5,89.3 26.5,89.6 arc90 26.3,89.8 arc90 26.1,89.6 26.1,89.3 arc-90 25.9,89.1 arc-90 25.7,89.3 25.7,89.6 arc90 25.5,89.8 arc90 25.3,89.6 25.3,89.3 arc-90 25.1,89.1 arc-90 24.9,89.3 24.9,89.6 arc90 24.7,89.8 arc90 24.5,89.6 24.5,89.3 arc-90 24.3,89.1 arc-90 24.1,89.3 24.1,89.6 arc90 23.9,89.8 arc90 23.7,89.6 23.7,89.3 arc-90 23.5,89.1 arc-90 23.3,89.3 23.3,89.8 arc90 23.1,90 arc90 22.9,89.8 22.9,89.3 arc-90 22.7,89.1 arc-90 22.5,89.3 22.5,90.2 arc90 22.3,90.4 arc90 22.1,90.2 22.1,89.3 arc-90 21.9,89.1 arc-90 21.7,89.3 21.7,90.8 arc90 21.5,91 arc90 21.3,90.8 21.3,89.3 arc-90 21.1,89.1 arc-90 20.9,89.3 20.9,91.3 arc90 20.7,91.5 20.1,91.5 arc-90 19.9,91.7 arc-90 20.1,91.9 20.5,91.9 arc90 20.7,92.1 arc90 20.5,92.3 20.3,92.3
  Top 0.16: 20.3,92.3 19.9,92.3 arc-90 19.7,92.5 arc-90 19.9,92.7 20.2,92.7 arc90 20.4,92.9 arc90 20.2,93.1 19.9,93.1 arc-90 19.7,93.3 arc-90 19.9,93.5 20.2,93.5 arc90 20.4,93.7 20.4,94.5 arc90 20.2,94.7 19.8,94.7 arc-90 19.6,94.9 19.6,95.9 arc-90 19.8,96.1 arc-90 20,95.9 20,95.4 arc90 20.2,95.2 arc90 20.4,95.4 20.4,96.2 arc-90 20.6,96.4 21,96.4 arc90 21.2,96.6 21.2,97.2 arc-90 21.4,97.4 22,97.4 arc90 22.2,97.6 arc90 22,97.8 21,97.8 arc90 20.8,97.6 20.8,97 arc-90 20.6,96.8 arc-90 20.4,97 20.4,97.1 arc90 20.2,97.3 arc90 20,97.1 20,96.7 arc-90 19.8,96.5 19.6,96.5 19.4,96.5 arc90 19.2,96.3 19.2,95.3 | 20.2,92.3 20.3,92.3 | 19.2,94.7 19.2,95.3
TRIANGLE
  cutout Top: 2.5,5.7 6.1,3.62 6.1,7.78
  cutout Top: 6.1,5.7 7.9,4.66 7.9,6.74
  cutout Top: 7.9,5.7 8.8,5.18 8.8,6.22
  cutout Top: 6.1,4.66 7,4.14 7,5.18
TRIANGLE1
  cutout Top: 4.3,6.74 4.3,8.82 2.5,7.78
  cutout Top: 3.4,8.3 3.4,9.34 2.5,8.82
  cutout Top: 5.2,7.26 5.2,8.3 4.3,7.78
TRIANGLE2
  cutout Top: 4.3,4.66 2.5,3.62 4.3,2.58
  cutout Top: 3.4,3.1 2.5,2.58 3.4,2.06
  cutout Top: 3.4,5.18 2.5,4.66 3.4,4.14

## Text on the board
bPlace: JLCJLCJLCJLC